# Altium PCB Unextended55.PcbDoc (part 1 of 2)
Units mm, origin at the board's own origin, x right, y up, seen from the top; angles counter-clockwise.
Board outline 275.2 x 94.2 mm, 2 copper layers (Component Side, Bottom Layer), stack 1.571 mm thick; 229 components, 125 nets, 706 pads, 180 vias.
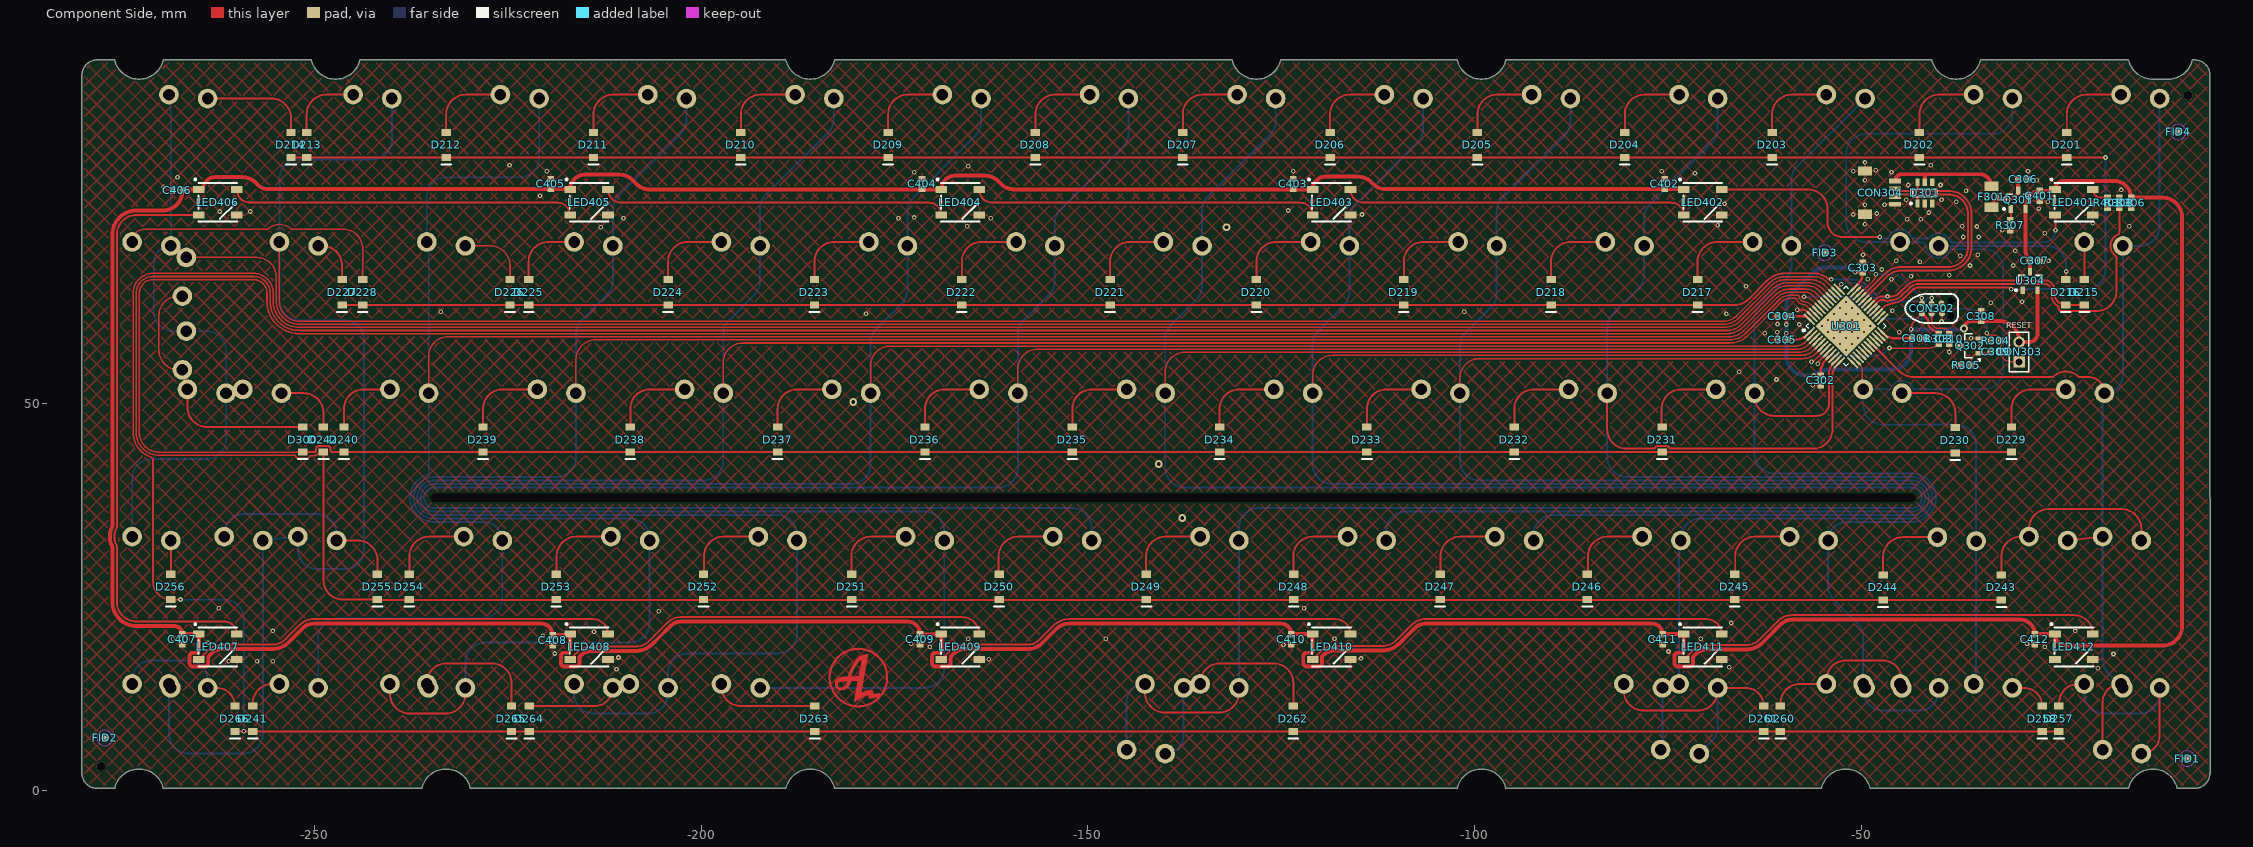
[diagram p0: Component Side view]
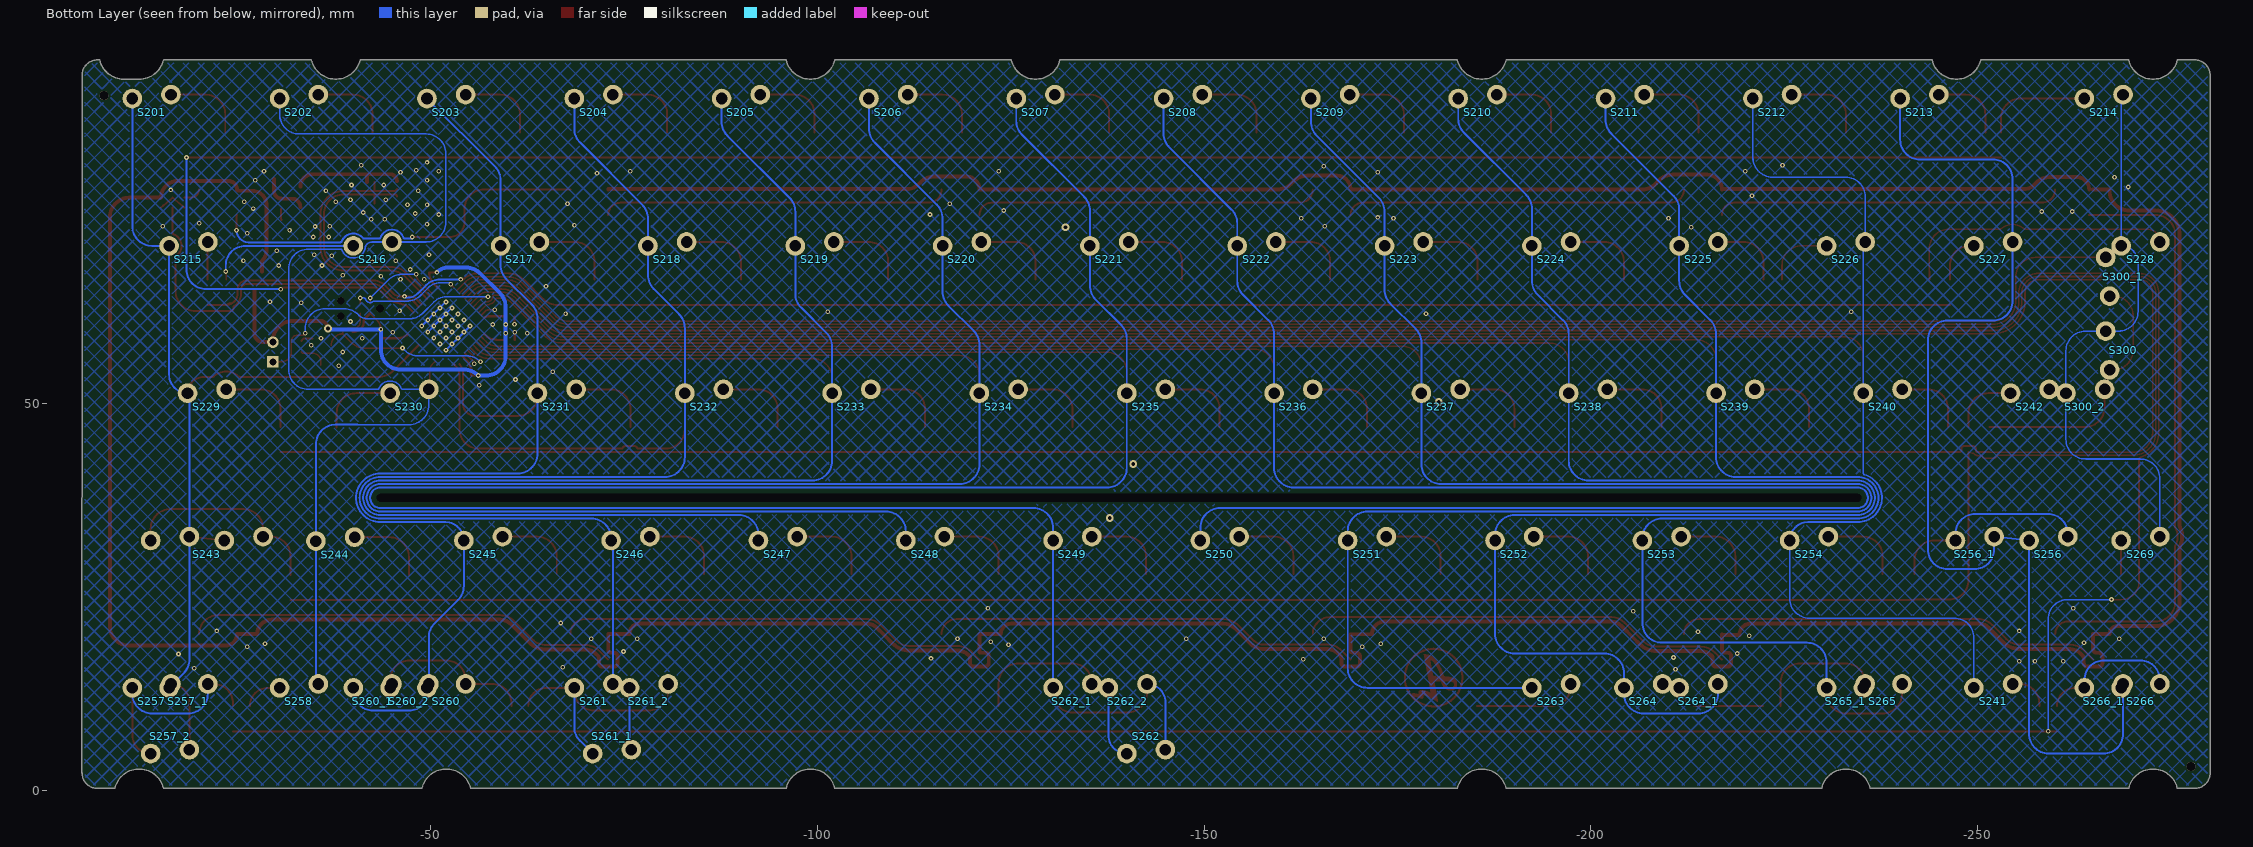
[diagram p1: Bottom Layer view, seen from below]

## Layer stack, top to bottom
Top Solder: solder mask 0.0102, Solder Resist, Dk 3.5
Component Side: signal copper 0.0356
Dielectric 1: core 1.5, FR-4, Dk 4.2
Bottom Layer: signal copper 0.0356
Solder Side: solder mask 0.0102, Solder Resist, Dk 3.5

## Board outline
-280.088,2.215 ccw(c-278.088,2.215) -278.088,0.215 -275.85,0.215 cw(c-272.7,-0.52) -269.55,0.215 -236.137,0.215 cw(c-232.987,-0.52) -229.838,0.215 -189.05,0.215 cw(c-185.9,-0.52) -182.75,0.215 -102.25,0.215 cw(c-99.1,-0.52) -95.95,0.215 -55.161,0.215 cw(c-52.011,-0.52) -48.861,0.215 -15.45,0.215 cw(c-12.3,-0.52) -9.15,0.215 -6.913,0.215 ccw(c-6.913,2.215) -4.913,2.215 ccw(c-4.913,2.238) -4.889,2.238 -4.889,36.576 -4.913,39.065 -4.913,92.415 ccw(c-6.913,92.415) -6.913,94.415 -7.177,94.415 cw(c-10.327,95.149) -10.283,91.915 -12.318,91.915 cw(c-12.3,95.15) -15.45,94.415 -34.575,94.415 cw(c-37.724,95.149) -40.874,94.415 -95.95,94.415 cw(c-99.1,95.149) -102.25,94.415 -125.061,94.415 cw(c-128.212,95.149) -131.361,94.415 -182.75,94.415 cw(c-185.9,95.149) -189.05,94.415 -244.125,94.415 cw(c-247.274,95.149) -250.424,94.415 -269.55,94.415 cw(c-272.7,95.149) -275.85,94.415 -278.088,94.415 ccw(c-278.088,92.415) -280.088,92.415 -280.088,39.065 -280.088,36.565

## Design rules (kind name [scope] priority, off if disabled: settings)
BoardOutlineClearance [All] p1: gap=0.254 ignorepadtopadclearanceinfootprint=FALSE except(0: Arc-SplitContinuation Track-SplitContinuation SMDPad-SplitContinuation THPad-SplitContinuation Via-SplitContinuation Fill-SplitContinuation Poly-SplitContinuation Region-SplitContinuation Text-SplitContinuation)
Clearance [All] p1: gap=0.2 ignorepadtopadclearanceinfootprint=FALSE except(0: Arc-Hole Track-Hole SMDPad-Hole THPad-Hole Via-Hole Fill-Hole Poly-Hole Region-Hole Text-Hole; 0.254: THPad-THPad THPad-Via THPad-Fill THPad-Poly THPad-Region THPad-Text Via-Via Via-Fill Via-Poly Via-Region Via-Text Fill-Fill Fill-Poly Fill-Region Fill-Text Poly-Poly Poly-Region Poly-Text Region-Region Region-Text Text-Text)
ComponentClearance [InComponent('No Component') And OnLayer('Component Side')] p1: gap=0.254 collisioncheckmode=3 verticalgap=0.254 showdistances=FALSE
DiffPairsRouting DiffPairsRouting_USB [InDifferentialPairClass('All Differential Pairs')] p1: maxlimit=0.254 minlimit=0.203 mostfreqgap=0.203 toplayer_minwidth=0.152 toplayer_maxwidth=0.381 toplayer_prefwidth=0.152 bottomlayer_minwidth=0.152 bottomlayer_maxwidth=0.381 bottomlayer_prefwidth=0.152 maxuncoupledlength=12.7
DiffPairsRouting [All] p2: maxlimit=0.254 minlimit=0.254 mostfreqgap=0.254 toplayer_minwidth=0.381 toplayer_maxwidth=0.381 toplayer_prefwidth=0.381 bottomlayer_minwidth=0.381 bottomlayer_maxwidth=0.381 bottomlayer_prefwidth=0.381 maxuncoupledlength=12.7
HoleSize [All] p1: absolutevalues=TRUE maxlimit=20 minlimit=0.025 maxpercent=80.000 minpercent=20.000
MatchedLengths MatchedLengths_USB_DiffPairs_1 [All] p1: tolerance=0.127 checknetsindiffpair=TRUE checkdiffpairvsdiffpair=FALSE checkxsignals=FALSE checkothers=FALSE
MatchedLengths MatchedLengths_USB_DiffPairs [All] p2: tolerance=0.127 checknetsindiffpair=TRUE checkdiffpairvsdiffpair=FALSE checkxsignals=FALSE checkothers=FALSE
PolygonConnect PolygonConnect_1 [All vs IsVia] p1: connectstyle=Direct reliefconductorwidth=0.254 reliefentries=4 polygonreliefangle="90 Angle" airgapwidth=0.254
PolygonConnect [All] p2: connectstyle=Relief reliefconductorwidth=0.254 reliefentries=4 polygonreliefangle="90 Angle" airgapwidth=0.254
RoutingVias [All] p1: holewidth=0.711 width=1.27 viastyle="Through Hole" minholewidth=0.711 minwidth=1.27 maxholewidth=0.711 maxwidth=1.27
SolderMaskExpansion [All] p1: expansion=0.102 istentingtop=FALSE
Width [All] p1: maxlimit=0.508 minlimit=0.203 preferedwidth=0.254 minimp=50.000000 maximp=50.000000 favimp=50.000000
27 further rules are at their usual default settings.

## Classes and differential pairs
component class 1_Unextended55_top: FID1 FID2 FID3 FID4
component class Designator: C201 C202 C203 C204 C205 C206 D201 D202 D203 D204 D205 D206 D207 D208 D209 D210 D211 D212 D213 D214 D215 D216 D217 D218 D219 D220 D221 D222 D223 D224 D225 D226 D227 D228 D229 D230 D231 D232 D233 D234 D235 D236 D237 D238 D239 D240 D241 D242 D243 D244 D245 D246 D247 D248 D249 D250 D251 D252 D253 D254 D255 D256 D257 D258 D260 D261 D262 D263 D264 D265 D266 D268 D300 S201 S202 S203 S204 S205 S206 S207 S208 S209 S210 S211 S212 S213 S214 S215 S216 S217 S218 S219 S220 S221 S222 S223 S224 S225 S226 S227 S228 S229 S230 S231 S232 S233 S234 S235 S236 S237 S238 S239 S240 S241 S242 S243 S244 S245 S246 S247 S248 S249 S250 S251 S252 S253 S254 S256 S256_1 S257 S257_1 S257_2 S258 S260 S260_1 S260_2 S261 S261_1 S261_2 S262 S262_1 S262_2 S263 S264 S264_1 S265 S265_1 S266 S266_1 S269 S300 S300_1 S300_2
differential pair D: +D_P -D_N

## Components (designator, comment, footprint, x,y, rotation, side; value= is the part's Value field where it differs from the comment)
C301 "" C0603[1608] -42.799,58.42 r180 top value=0.1uF
C302 "" C0603[1608] -55.245,52.959 r90 top value=0.1uF
C303 "" C0603[1608] -49.784,67.564 r270 top value=0.1uF
C304 "" C0603[1608] -60.198,61.249 r0 top value=0.1uF
C305 "" C0603[1608] -60.198,58.201 r0 top value=0.1uF
C306 "" C0603[1608] -29.083,78.994 r180 top value=4.7uF
C307 "" C0603[1608] -27.559,68.453 r180 top value=1uF
C308 "" C0603[1608] -34.487,61.291 r270 top value=1uF
C309 "" C0603[1608] -32.639,56.677 r180 top value=4.7uF
C310 "" C0603[1608] -38.608,58.328 r270 top value=470nF
C401 "" C0603[1608] -26.924,76.835 r90 top value=0.1uF
C402 "" C0603[1608] -75.438,78.374 r270 top value=0.1uF
C403 "" C0603[1608] -123.444,78.374 r270 top value=0.1uF
C404 "" C0603[1608] -171.45,78.374 r270 top value=0.1uF
C405 "" C0603[1608] -219.456,78.374 r270 top value=0.1uF
C406 "" C0603[1608] -267.736,77.56 r0 top value=0.1uF
C407 "" C0603[1608] -267.086,19.502 r90 top value=0.1uF
C408 "" C0603[1608] -219.207,19.375 r90 top value=0.1uF
C409 "" C0603[1608] -171.709,19.5 r90 top value=0.1uF
C410 "" C0603[1608] -123.703,19.502 r90 top value=0.1uF
C411 "" C0603[1608] -75.697,19.502 r90 top value=0.1uF
C412 "" C0603[1608] -27.564,19.502 r90 top value=0.1uF
CON302 "TC2030-IDC" TC2030-IDC-NL -40.894,62.265 r0 top
CON303 "Header 2" HDR1X2 -29.591,55.372 r90 top
CON304 "Header 5" "JST SM04B-SRSS-TB" -49.5,77.25 r270 top
D201 "Diode" SOD-123 -23.431,83.415 r90 top
D202 "Diode" SOD-123 -42.481,83.415 r90 top
D203 "Diode" SOD-123 -61.531,83.415 r90 top
D204 "Diode" SOD-123 -80.581,83.415 r90 top
D205 "Diode" SOD-123 -99.632,83.415 r90 top
D206 "Diode" SOD-123 -118.681,83.415 r90 top
D207 "Diode" SOD-123 -137.731,83.415 r90 top
D208 "Diode" SOD-123 -156.781,83.415 r90 top
D209 "Diode" SOD-123 -175.832,83.415 r90 top
D210 "Diode" SOD-123 -194.881,83.415 r90 top
D211 "Diode" SOD-123 -213.931,83.415 r90 top
D212 "Diode" SOD-123 -232.981,83.415 r90 top
D213 "Diode" SOD-123 -251.016,83.415 r90 top
D214 "Diode" SOD-123 -253.047,83.415 r90 top
D215 "Diode" SOD-123 -21.145,64.365 r90 top
D216 "Diode" SOD-123 -23.558,64.365 r90 top
D217 "Diode" SOD-123 -71.162,64.365 r90 top
D218 "Diode" SOD-123 -90.106,64.365 r90 top
D219 "Diode" SOD-123 -109.156,64.365 r90 top
D220 "Diode" SOD-123 -128.207,64.365 r90 top
D221 "Diode" SOD-123 -147.13,64.365 r90 top
D222 "Diode" SOD-123 -166.306,64.365 r90 top
D223 "Diode" SOD-123 -185.356,64.365 r90 top
D224 "Diode" SOD-123 -204.279,64.365 r90 top
D225 "Diode" SOD-123 -222.314,64.365 r90 top
D226 "Diode" SOD-123 -224.726,64.365 r90 top
D227 "Diode" SOD-123 -246.444,64.365 r90 top
D228 "Diode" SOD-123 -243.776,64.365 r90 top
D229 "Diode" SOD-123 -30.575,45.315 r90 top
D230 "Diode" SOD-123 -37.846,45.212 r90 top
D231 "Diode" SOD-123 -75.755,45.315 r90 top
D232 "Diode" SOD-123 -94.869,45.315 r90 top
D233 "Diode" SOD-123 -113.919,45.315 r90 top
D234 "Diode" SOD-123 -132.969,45.315 r90 top
D235 "Diode" SOD-123 -152.019,45.315 r90 top
D236 "Diode" SOD-123 -171.069,45.315 r90 top
D237 "Diode" SOD-123 -190.119,45.315 r90 top
D238 "Diode" SOD-123 -209.169,45.315 r90 top
D239 "Diode" SOD-123 -228.219,45.315 r90 top
D240 "Diode" SOD-123 -246.189,45.315 r90 top
D241 "Diode" SOD-123 -258,9.215 r90 top
D242 "Diode" SOD-123 -248.856,45.315 r90 top
D243 "Diode" SOD-123 -31.877,26.194 r90 top
D244 "Diode" SOD-123 -47.175,26.194 r90 top
D245 "Diode" SOD-123 -66.358,26.265 r90 top
D246 "Diode" SOD-123 -85.407,26.265 r90 top
D247 "Diode" SOD-123 -104.457,26.265 r90 top
D248 "Diode" SOD-123 -123.38,26.265 r90 top
D249 "Diode" SOD-123 -142.43,26.265 r90 top
D250 "Diode" SOD-123 -161.481,26.265 r90 top
D251 "Diode" SOD-123 -180.53,26.265 r90 top
D252 "Diode" SOD-123 -199.707,26.265 r90 top
D253 "Diode" SOD-123 -218.757,26.265 r90 top
D254 "Diode" SOD-123 -237.744,26.265 r90 top
D255 "Diode" SOD-123 -241.871,26.265 r90 top
D256 "Diode" SOD-123 -268.587,26.265 r90 top
D257 "Diode" SOD-123 -24.447,9.215 r90 top
D258 "Diode" SOD-123 -26.607,9.215 r90 top
D260 "Diode" SOD-123 -60.452,9.215 r90 top
D261 "Diode" SOD-123 -62.611,9.215 r90 top
D262 "Diode" SOD-123 -123.444,9.215 r90 top
D263 "Diode" SOD-123 -185.293,9.215 r90 top
D264 "Diode" SOD-123 -222.25,9.215 r90 top
D265 "Diode" SOD-123 -224.536,9.215 r90 top
D266 "Diode" SOD-123 -260.286,9.215 r90 top
D300 "Diode" SOD-123 -251.523,45.315 r90 top
D301 "SRV05" SOT-23-6 -41.783,77.216 r90 top
Designator31 "Comment" "ALPS-switch - 1.25U" -18.161,-121.539 r180 bottom
Designator32 "Comment" "ALPS-switch - 1.5U" -44.323,-121.031 r180 bottom
Designator33 "Comment" "ALPS-switch - 1.75" -74.89,-121.602 r180 bottom
Designator34 "Comment" Alps-switch -279.146,-119.253 r180 bottom
Designator34 "Comment" "ALPS-switch - 1.75" -214.289,-119.435 r180 bottom
Designator34_1 "Comment" Alps-switch -239.522,-151.384 r180 bottom
Designator34_1_1 "Comment" Alps-switch -235.458,-84.455 r180 bottom
Designator35 "Comment" Alps-switch -260.096,-119.253 r180 bottom
Designator35_1 "Comment" Alps-switch -35.562,-153.924 r180 bottom
Designator35_2 "Comment" Alps-switch -220.472,-151.384 r180 bottom
Designator35_2_1 "Comment" Alps-switch -216.408,-84.455 r180 bottom
Designator35_3 "Comment" Alps-switch -277.495,-151.384 r180 bottom
Designator35_3_1 "Comment" Alps-switch -273.431,-84.455 r180 bottom
Designator35_4 "Comment" Alps-switch -74.932,-83.312 r180 bottom
Designator35_5 "Comment" Alps-switch -55.755,-82.423 r180 bottom
Designator35_6 "Comment" Alps-switch -36.832,-82.169 r180 bottom
Designator35_7 "Comment" Alps-switch -16.893,-82.423 r180 bottom
Designator36 "Comment" Alps-switch -240.665,-119.253 r180 bottom
Designator36_1 "Comment" Alps-switch -16.55,-153.924 r180 bottom
Designator36_2 "Comment" Alps-switch -54.523,-154.178 r180 bottom
Designator36_3 "Comment" Alps-switch -201.041,-151.384 r180 bottom
Designator36_3_1 "Comment" Alps-switch -196.977,-84.455 r180 bottom
Designator36_4 "Comment" Alps-switch -258.064,-151.384 r180 bottom
Designator36_4_1 "Comment" Alps-switch -254,-84.455 r180 bottom
Designator37 "Comment" "ALPS-switch - 1.75" -80.732,-154.051 r180 bottom
Designator38 "Comment" "ALPS-switch - 1.5U" -264.822,-186.524 r180 bottom
Designator39 "Comment" "ALPS-switch - 1.5U" -235.866,-186.524 r180 bottom
Designator40 "Comment" "ALPS-switch - 1.5U" -22.379,-186.524 r180 bottom
Designator41 "Comment" "ALPS-switch - 1.5U" -49.938,-186.524 r180 bottom
F301 "Fuse Thermal" C1206[3216] -33.147,76.708 r90 top
FID1 "Plug" Fiducial_Nordic -7.874,4.064 r90 top
FID2 "Plug" Fiducial_Nordic -277.114,6.731 r90 top
FID3 "Plug" Fiducial_Nordic -54.737,69.469 r90 top
FID4 "Plug" Fiducial_Nordic -9.017,85.09 r90 top
LED401 "WS2812B" "WS2812B - 5050" -22.5,76 r0 top
LED402 "WS2812B" "WS2812B - 5050" -70.499,76 r0 top
LED403 "WS2812B" "WS2812B - 5050" -118.499,76 r0 top
LED404 "WS2812B" "WS2812B - 5050" -166.499,76 r0 top
LED405 "WS2812B" "WS2812B - 5050" -214.499,76 r0 top
LED406 "WS2812B" "WS2812B - 5050" -262.499,76 r0 top
LED407 "WS2812B" "WS2812B - 5050" -262.499,18.5 r0 top
LED408 "WS2812B" "WS2812B - 5050" -214.499,18.5 r0 top
LED409 "WS2812B" "WS2812B - 5050" -166.499,18.5 r0 top
LED410 "WS2812B" "WS2812B - 5050" -118.499,18.5 r0 top
LED411 "WS2812B" "WS2812B - 5050" -70.499,18.5 r0 top
LED412 "WS2812B" "WS2812B - 5050" -22.5,18.5 r0 top
Q301 "PMOS-2" SOT-23-3 -29.718,76.327 r90 top
Q302 "2N7002 NMOS" SOT-23-3 -35.941,57.439 r180 top
R303 "Res1" R0603[1608] -40.005,58.328 r270 top value=10K
R304 "Res1" R0603[1608] -32.639,58.074 r180 top value=10K
R305 "Res1" R0603[1608] -36.449,54.899 r180 top value=100K
R306 "Res1" R0603[1608] -15.113,75.946 r270 top value=10K
R307 "Res1" R0603[1608] -30.734,73.025 r270 top value=10K
R308 "Res1" R0603[1608] -16.637,75.946 r270 top value=470
R401 "Res1" R0603[1608] -18.161,75.946 r90 top value=470R
S201 "MX" "Alps-switch - switched pol" -13.912,85.415 r180 bottom locked
S202 "MX" "Alps-switch - switched pol" -32.962,85.415 r180 bottom locked
S203 "MX" "Alps-switch - switched pol" -52.012,85.415 r180 bottom locked
S204 "MX" "Alps-switch - switched pol" -71.062,85.415 r180 bottom locked
S205 "MX" "Alps-switch - switched pol" -90.112,85.415 r180 bottom locked
S206 "MX" "Alps-switch - switched pol" -109.162,85.415 r180 bottom locked
S207 "MX" "Alps-switch - switched pol" -128.212,85.415 r180 bottom locked
S208 "MX" "Alps-switch - switched pol" -147.262,85.415 r180 bottom locked
S209 "MX" "Alps-switch - switched pol" -166.312,85.415 r180 bottom locked
S210 "MX" "Alps-switch - switched pol" -185.362,85.415 r180 bottom locked
S211 "MX" "Alps-switch - switched pol" -204.412,85.415 r180 bottom locked
S212 "MX" "Alps-switch - switched pol" -223.462,85.415 r180 bottom locked
S213 "MX" "Alps-switch - switched pol" -242.512,85.415 r180 bottom locked
S214 "MX" "ALPS-switch - 1.5U" -266.325,85.415 r180 bottom locked
S215 "MX" "Alps-switch - switched pol" -18.675,66.365 r180 bottom locked
S216 "MX" Alps-switch -42.487,66.365 r180 bottom locked
S217 "MX" "Alps-switch - switched pol" -61.537,66.365 r180 bottom locked
S218 "MX" "Alps-switch - switched pol" -80.587,66.365 r180 bottom locked
S219 "MX" "Alps-switch - switched pol" -99.637,66.365 r180 bottom locked
S220 "MX" "Alps-switch - switched pol" -118.687,66.365 r180 bottom locked
S221 "MX" "Alps-switch - switched pol" -137.737,66.365 r180 bottom locked
S222 "MX" "Alps-switch - switched pol" -156.787,66.365 r180 bottom locked
S223 "MX" "Alps-switch - switched pol" -175.837,66.365 r180 bottom locked
S224 "MX" "Alps-switch - switched pol" -194.887,66.365 r180 bottom locked
S225 "MX" "Alps-switch - switched pol" -213.937,66.365 r180 bottom locked
S226 "MX" Alps-switch -232.987,66.365 r180 bottom locked
S227 "MX" Alps-switch -252.037,66.365 r180 bottom locked
S228 "MX" "Alps-switch - switched pol" -271.087,66.365 r180 bottom locked
S229 "MX" "Alps-switch - switched pol" -21.056,47.315 r180 bottom locked
S230 "MX" Alps-switch -47.25,47.315 r180 bottom locked
S231 "MX" "Alps-switch - switched pol" -66.3,47.315 r180 bottom locked
S232 "MX" "Alps-switch - switched pol" -85.35,47.315 r180 bottom locked
S233 "MX" "Alps-switch - switched pol" -104.4,47.315 r180 bottom locked
S234 "MX" "Alps-switch - switched pol" -123.45,47.315 r180 bottom locked
S235 "MX" "Alps-switch - switched pol" -142.5,47.315 r180 bottom locked
S236 "MX" "Alps-switch - switched pol" -161.55,47.315 r180 bottom locked
S237 "MX" "Alps-switch - switched pol" -180.6,47.315 r180 bottom locked
S238 "MX" "Alps-switch - switched pol" -199.65,47.315 r180 bottom locked
S239 "MX" "Alps-switch - switched pol" -218.7,47.315 r180 bottom locked
S240 "MX" "Alps-switch - switched pol" -237.75,47.315 r180 bottom locked
S241 "MX" Alps-switch -252.037,9.215 r180 bottom
S242 "MX" Alps-switch -256.775,47.315 r180 bottom locked
S243 "MX" "ALPS-switch - Left shift v2" -25.819,28.265 r180 bottom locked
S244 "MX" Alps-switch -37.655,28.194 r180 bottom locked
S245 "MX" "Alps-switch - switched pol" -56.775,28.265 r180 bottom locked
S246 "MX" "Alps-switch - switched pol" -75.825,28.265 r180 bottom locked
S247 "MX" "Alps-switch - switched pol" -94.875,28.265 r180 bottom locked
S248 "MX" "Alps-switch - switched pol" -113.925,28.265 r180 bottom locked
S249 "MX" "Alps-switch - switched pol" -132.975,28.265 r180 bottom locked
S250 "MX" "Alps-switch - switched pol" -152.025,28.265 r180 bottom locked
S251 "MX" "Alps-switch - switched pol" -171.075,28.265 r180 bottom locked
S252 "MX" "Alps-switch - switched pol" -190.124,28.265 r180 bottom locked
S253 "MX" "Alps-switch - switched pol" -209.175,28.265 r180 bottom locked
S254 "MX" "Alps-switch - switched pol" -228.225,28.265 r180 bottom locked
S256 "MX" "ALPS-switch - 2.25U" -259.18,28.265 r180 bottom locked
S256_1 "MX" "Alps-switch - switched pol" -249.655,28.265 r180 bottom locked
S257 "MX" "Alps-switch - switched pol" -13.912,9.215 r180 bottom
S257_1 "MX" Alps-switch -18.675,9.215 r180 bottom
S257_2 "MX" Alps-switch -16.294,9.215 r0 bottom
S258 "MX" Alps-switch -32.962,9.215 r180 bottom
S260 "MX" "Alps-switch - switched pol" -52.012,9.215 r180 bottom
S260_1 "MX" "Alps-switch - switched pol" -42.487,9.215 r180 bottom
S260_2 "MX" Alps-switch -47.25,9.215 r180 bottom
S261 "MX" Alps-switch -71.062,9.215 r180 bottom
S261_1 "MX" "Alps-switch - switched pol" -73.444,9.215 r0 bottom
S261_2 "MX" "Alps-switch - switched pol" -78.206,9.215 r180 bottom
S262 "MX" Alps-switch -142.5,9.215 r0 bottom
S262_1 "MX" Alps-switch -132.975,9.215 r180 bottom
S262_2 "MX" "Alps-switch - switched pol" -140.119,9.215 r180 bottom
S263 "MX" Alps-switch -194.887,9.215 r180 bottom
S264 "MX" "Alps-switch - switched pol" -206.794,9.215 r180 bottom
S264_1 "MX" Alps-switch -213.937,9.215 r180 bottom
S265 "MX" "Alps-switch - switched pol" -237.75,9.215 r180 bottom
S265_1 "MX" Alps-switch -232.987,9.215 r180 bottom
S266 "MX" "Alps-switch - switched pol" -271.087,9.215 r180 bottom
S266_1 "MX" Alps-switch -266.325,9.215 r180 bottom
S269 "MX" Alps-switch -271.087,28.265 r180 bottom locked
S300 "MX" Alps-switch -271.087,56.84 r90 bottom locked
S300_1 "MX" Alps-switch -271.087,66.365 r90 bottom locked
S300_2 "MX" "Alps-switch - switched pol" -263.944,47.315 r180 bottom locked
U301 "STM32F072/F303_LQFP48" "STM32 - COMBO 7X7MM" -51.97,60 r45 top locked
U304 "XC6206P332MR" SOT-23-3 -28.172,65.828 r90 top

## Footprints (in the part's own frame and the unit in brackets; to place one, negate y for a bottom-side part, rotate by r counter-clockwise, add the part's x,y. Pads: shape width x height; smd on the part's side, far side on the other; paste and mask are expansions set on the pad)
Alps-switch [mm]
  round 2.54 hole 1.5 mask+0.102: 1(-2.5,4) 2(2.5,4.5)
  round 1 on Mech14: ""(0,0)
"ALPS-switch - 1.5U" [mm]
  round 2.54 hole 1.5 mask+0.102: 1(-2.5,4) 2(2.5,4.5)
  round 1 on Mech14: ""(0,0)
"ALPS-switch - 1.25U" [mm]
  round 2.54 hole 1.5 mask+0.102: 1(-2.5,4) 2(2.5,4.5)
  round 1 on Mech14: ""(0,0)
"ALPS-switch - 1.75" [mm]
  round 2.54 hole 1.5 mask+0.102: 1(-2.5,4) 2(2.5,4.5)
  round 1 on Mech14: ""(0,0)
"ALPS-switch - 2.25U" [mm]
  round 2.54 hole 1.5 mask+0.102: 1(-2.5,4) 2(2.5,4.5)
  round 1 on Mech14: ""(0,0)
"ALPS-switch - Left shift v2" [mm]
  round 2.54 hole 1.5 mask+0.102: 1(-12.025,4) 1(2.5,4.5) 2(-7.025,4.5) 2(-2.5,4)
  round 1 on Mech14: ""(-9.525,0) ""(0,0)
"Alps-switch - switched pol" [mm]
  round 2.54 hole 1.5 mask+0.102: 1(2.5,4.5) 2(-2.5,4)
  round 1 on Mech14: ""(0,0)
C0603[1608] [mm] "Chip Resistor, 2-Leads, Body 1,57x0,80mm, IPC Medium Density"
  rect 0.8x0.85 smd: 1(-0.65,0) 2(0.65,0)
  body extent -0.83,-0.43 0.82,0.43, height 0.5
C1206[3216] [mm]
  rect 1.2x1.8 smd: 1(-1.35,0) 2(1.35,0)
  silkscreen extent -0.35,-0.8 0.35,0.8, body extent -1.6,-0.9 1.6,0.9, height 1.2
Fiducial_Nordic [mm]
  round 1 smd paste+0 mask+0.5: 0(0,0)
  Component Side keep-out circle w0.01: c0,0 r1
HDR1X2 [mm] "Connector; Header; 2 Position"
  rect 1.5x1.5 hole 0.9: 1(0,0)
  round 1.5 hole 0.9: 2(2.54,0)
  silkscreen extent -1.27,-1.27 3.81,1.27
"JST SM04B-SRSS-TB" [mm]
  rect 0.6x1.55 smd: 1(-1.5,3.875) 2(-0.5,3.875) 3(0.5,3.875) 4(1.5,3.875)
  rect 1.2x1.8 smd: 5(-2.8,0) 5(2.8,0)
  body extent -3.01,-0.76 2.99,4.19, height 3.25
R0603[1608] [mm] "Chip Resistor, 2-Leads, Body 1,57x0,80mm, IPC Medium Density"
  rect 0.8x0.85 smd: 1(-0.65,0) 2(0.65,0)
  body extent -0.83,-0.43 0.82,0.43, height 0.5
SOD-123 [mm]
  rect 0.91x1.22 smd: 1(1.635,0) 2(-1.635,0)
  silkscreen extent -2.54,-0.64 -2.54,0.63, body extent -1.87,-0.85 1.88,0.85, height 1.2
SOT-23-3 [mm] "3.3v regulator, used in Windsond S2 proto 1"
  rect 1x0.55 smd: 1(-1.2,0.95) 2(-1.2,-0.95) 3(1.2,0)
  silkscreen extent -1.32,-1.55 0.7,1.95, body extent -1.45,-1.5 1.1,1.5, height 1
SOT-23-6 [mm]
  rect 1x0.55 smd: 1(-1.375,0.95) 2(-1.375,0) 3(-1.375,-0.95) 4(1.375,-0.95) 5(1.375,0) 6(1.375,0.95)
  silkscreen extent -1.5,-1.55 0.46,1.92, body extent -1.37,-1.44 1.47,1.49, height 1.05
"STM32 - COMBO 7X7MM" [mm] "LQFP48, 7x7mm"
  oval 1.45x0.3 smd paste-5: 1(-4.225,2.75) 2(-4.225,2.25) 3(-4.225,1.75) 4(-4.225,1.25) 5(-4.225,0.75) 6(-4.225,0.25) 7(-4.225,-0.25) 8(-4.225,-0.75) 9(-4.225,-1.25) 10(-4.225,-1.75) 11(-4.225,-2.25) 12(-4.225,-2.75) 25(4.225,-2.75) 26(4.225,-2.25) 27(4.225,-1.75) 28(4.225,-1.25) 29(4.225,-0.75) 30(4.225,-0.25) 31(4.225,0.25) 32(4.225,0.75) 33(4.225,1.25) 34(4.225,1.75) 35(4.225,2.25) 36(4.225,2.75)
  oval 0.8x0.25 smd: 1(-3.4,2.75) 2(-3.4,2.25) 3(-3.4,1.75) 4(-3.4,1.25) 5(-3.4,0.75) 6(-3.4,0.25) 7(-3.4,-0.25) 8(-3.4,-0.75) 9(-3.4,-1.25) 10(-3.4,-1.75) 11(-3.4,-2.25) 12(-3.4,-2.75) 25(3.4,-2.75) 26(3.4,-2.25) 27(3.4,-1.75) 28(3.4,-1.25) 29(3.4,-0.75) 30(3.4,-0.25) 31(3.4,0.25) 32(3.4,0.75) 33(3.4,1.25) 34(3.4,1.75) 35(3.4,2.25) 36(3.4,2.75)
  oval 0.25x0.8 smd: 13(-2.75,-3.4) 14(-2.25,-3.4) 15(-1.75,-3.4) 16(-1.25,-3.4) 17(-0.75,-3.4) 18(-0.25,-3.4) 19(0.25,-3.4) 20(0.75,-3.4) 21(1.25,-3.4) 22(1.75,-3.4) 23(2.25,-3.4) 24(2.75,-3.4) 37(2.75,3.4) 38(2.25,3.4) 39(1.75,3.4) 40(1.25,3.4) 41(0.75,3.4) 42(0.25,3.4) 43(-0.25,3.4) 44(-0.75,3.4) 45(-1.25,3.4) 46(-1.75,3.4) 47(-2.25,3.4) 48(-2.75,3.4)
  oval 0.3x1.45 smd paste-5: 13(-2.75,-4.225) 14(-2.25,-4.225) 15(-1.75,-4.225) 16(-1.25,-4.225) 17(-0.75,-4.225) 18(-0.25,-4.225) 19(0.25,-4.225) 20(0.75,-4.225) 21(1.25,-4.225) 22(1.75,-4.225) 23(2.25,-4.225) 24(2.75,-4.225) 37(2.75,4.225) 38(2.25,4.225) 39(1.75,4.225) 40(1.25,4.225) 41(0.75,4.225) 42(0.25,4.225) 43(-0.25,4.225) 44(-0.75,4.225) 45(-1.25,4.225) 46(-1.75,4.225) 47(-2.25,4.225) 48(-2.75,4.225)
  rect 5.6x5.6 smd: 47(0,0)
  silkscreen extent -4.43,-3.65 3.65,3.65, body extent -3.52,-3.52 3.52,3.52, height 0.5
TC2030-IDC-NL [mm] "Tag-Connect 6-Pin with No Legs (PN# TC2030-IDC-NL)"
  round 0.9 hole 0.995 unplated: 0(-2.54,0) 0(2.54,-1.016) 0(2.54,1.016)
  round 0.79 smd paste-0.39: 1(-1.27,-0.635) 2(-1.27,0.635) 3(0,-0.635) 4(0,0.635) 5(1.35,-0.635) 6(1.27,0.635)
  silkscreen extent -3.43,-1.91 3.43,1.9
"WS2812B - 5050" [mm]
  rect 1.5x0.9 smd: 1(-2.45,1.65) 2(-2.45,-1.65) 3(2.45,-1.65) 4(2.45,1.65)
  silkscreen extent -3.05,-2.5 2.5,3.07, body extent -2.65,-2.45 2.7,2.5, height 1.5

## Part data
C301 C302 C303 C304 C305 C401 C402 C403 C404 C405 C406 C407 C408 C409 C410 C411 C412: library part Cap, "Capacitor", LCSC MFG=YAGEO, LCSC Part #=C14663, MRF.Part=CC0603KRX7R9BB104, Version="0603 imperial"
C306 C309: library part Cap, "Capacitor", LCSC MFG="Samsung Electro-Mechanics", LCSC Part #=C19666, MRF.Part=CL10A475KO8NNNC, Version="0603 imperial"
C307 C308: library part Cap, "Capacitor", LCSC MFG="Samsung Electro-Mechanics", LCSC Part #=C15849, MRF.Part=CL10A105KB8NNNC, Version="0603 imperial"
C310: library part Cap, "Capacitor", LCSC MFG="Samsung Electro-Mechanics", LCSC Part #=C1623, MRF.Part=CL10B474KA8NNNC, Version="0603 imperial"
CON302: library part "Header 3X2", "Header, 3-Pin, Dual row"
CON303: "Header, 2-Pin"
CON304: "JST for USB daughter board", LCSC MFG="JST Sales America", LCSC Part #=C160404, MRF.Part=SM04B-SRSS-TB(LF)(SN)
D201 D202 D203 D204 D205 D206 D207 D208 D209 D210 D211 D212 D213 D214 D215 D216 D217 D218 D219 D220 D221 D222 D223 D224 D225 D226 D227 D228 D229 D230 D231 D232 D233 D234 D235 D236 D237 D238 D239 D240 D241 D242 D243 D244 D245 D246 D247 D248 D249 D250 D251 D252 D253 D254 D255 D256 D257 D258 D260 D261 D262 D263 D264 D265 D266 D300: "Default Diode", LCSC MFG=ST(Semtech), LCSC Part #=C81598, MRF.Part=1N4148W, Version=SOD-123
D301: LCSC MFG="ProTek Devices", LCSC Part #=C85364, MRF.Part=SRV05-4-P-T7
F301: "Thermal Fuse", LCSC MFG="Shenzhen JDT Fuse", LCSC Part #=C135338, MRF.Part=ASMD1206-050
LED401 LED402 LED403 LED404 LED405 LED406 LED407 LED408 LED409 LED410 LED411 LED412: LCSC MFG=Worldsemi, LCSC Part #=C2874885, MRF.Part=WS2812B-V5/W
Q301: "P-Channel Power MOSFET", LCSC MFG="Vishay Intertech", LCSC Part #=C10487, MRF.Part=SI2301CDS-T1-GE3, Version=SOT23-3
Q302: library part MOSFET-N, "N-Channel MOSFET", LCSC MFG="Changjiang Electronics Tech (CJ)", LCSC Part #=C8545, MRF.Part=2N7002
R303 R304 R306 R307: "Resistor", LCSC MFG="Uniroyal Elec", LCSC Part #=C25804, MRF.Part=0603WAF1002T5E, Version="0603 imperial"
R305: "Resistor", LCSC MFG="Uniroyal Elec", LCSC Part #=C25803, MRF.Part=0603WAF1003T5E, Version="0603 imperial"
R308 R401: "Resistor", LCSC MFG="UNI-ROYAL(Uniroyal Elec)", LCSC Part #=C23179, MRF.Part=0603WAF4700T5E, Version="0603 imperial"
S201 S202 S203 S204 S205 S206 S207 S208 S209 S210 S211 S212 S213 S214 S216 S217 S218 S219 S220 S221 S222 S223 S224 S225 S226 S227 S228 S229 S230 S231 S232 S233 S234 S235 S236 S237 S238 S239 S240 S241 S242 S243 S244 S245 S246 S247 S248 S249 S250 S251 S252 S253 S254 S256 S256_1 S257 S257_1 S257_2 S258 S260 S260_1 S260_2 S261 S261_1 S261_2 S262 S262_1 S262_2 S263 S264 S264_1 S265 S265_1 S266 S266_1 S269 S300 S300_1 S300_2: library part SW-PB, "Switch"
S215: library part SW-PB, "TAB"
U301: LCSC MFG=Geehy, LCSC Part #=C915660, MRF.Part=APM32F072CBT6
U304: library part "SOT23 LDO", LCSC MFG="Torex Semicon", LCSC Part #=C5446, MRF.Part=XC6206P332MR

## Free pads (board coordinates)
  round 1.152 hole 1.152 unplated paste+0.148 mask+0.148: ""(-277.622,3.048) ""(-7.747,89.789)
  round 0 hole 1 slot 192 at 0 deg unplated: ""(-139,37.79)

## Via types
v1: diameter 0.6, hole 0.3, Component Side to Bottom Layer, tented both sides, 150 vias
v2: diameter 0.6, hole 0.3, Component Side to Bottom Layer, tented bottom, 25 vias
v3: diameter 1, hole 0.5, Component Side to Bottom Layer, tented both sides, 5 vias

## Nets (pads, with @x,y where several pads share a name; then routed paths per layer and width w, separated by ;. In a path a pad name is that pad's centre, name@x,y a point inside that pad or via, vN(x,y) a via of type N, cw(c..) or ccw(c..) an arc to the next point about the centre after c; other vN are vias at no path point)
BOOT0: C309.1 CON303.1 R304.1 U301.44 | length 36.3
  Component Side w0.203: v1(-57.404,63.777) cw(c-57.404,62.339) -57.245,63.769 cw(c-57.404,62.339) -56.387,63.356 U301.44@-55.488,62.457 ; v1(-33.782,59.055) ccw(c-33.528,59.055) -33.528,58.801 -32.716,58.801 cw(c-32.716,58.074) R304.1@-31.989,58.074 C309.1@-31.989,56.677 ccw(c-30.684,56.677) -30.684,55.372 CON303.1@-29.591,55.372
  Bottom Layer w0.203: v1(-57.404,63.777) -52.009,63.777 cw(c-52.009,61.529) -50.419,63.119 -48.895,61.595 ccw(c-47.362,63.128) -48.894,61.594 ccw(c-47.362,63.128) -47.362,60.96 -41.687,60.96 ccw(c-41.687,62.261) -40.767,61.341 -40.618,61.49 cw(c-38.831,59.703) -38.831,62.23 -36.322,62.23 cw(c-36.322,59.69) -33.782,59.69 v1(-33.782,59.055)
col1: S201.2 S215.2 S229.2 S243.2 S257.1 S257_1.1 S257_2.1 U301.20 | length 130.3
  Component Side w0.254: U301.20@-48.452,57.543 -45.064,54.155 ccw(c-43.268,55.951) -43.268,53.411 -25.312,53.411 ccw(c-25.313,53.665) -25.139,53.48 cw(c-23.556,51.815) -21.973,53.48 ; S243.2@-23.319,32.265 S243.2@-18.794,32.765 ; -22.366,53.78 cw(c-23.556,51.815) -21.974,53.48 ; S257_2.1@-18.794,5.215 -18.794,11.334 cw(c-16.412,11.334) S257.1@-16.412,13.715 ; S229.2@-18.556,51.315 ccw(c-20.652,51.315) -20.652,53.411 -21.801,53.411 cw(c-21.8,53.665) -21.973,53.48
  Bottom Layer w0.254: S257_1.1@-16.175,13.215 -18.05,15.09 cw(c-16.254,16.886) -18.794,16.886 S243.2@-18.794,32.765 -18.794,51.078 cw(c-18.556,51.078) S229.2@-18.556,51.315 ccw(c-18.556,53.696) -16.175,53.696 S215.2@-16.175,70.365 -13.952,70.365 ccw(c-13.952,72.905) -11.412,72.905 S201.2@-11.412,89.415
col2: S202.2 S216.2 S230.2 S244.1 S258.2 U301.14 | length 148.8
  Component Side w0.203: U301.14@-50.573,55.421 -50.177,55.025 cw(c-50.846,54.356) -49.9,54.356 -49.9,52.177 ccw(c-49.388,52.177) S230.2@-49.75,51.815
  Bottom Layer w0.203: -40.513,47.244 -47.21,47.244 cw(c-47.21,49.784) -49.75,49.784 S230.2@-49.75,51.815 -46.379,51.815 ccw(c-46.38,52.018) -46.193,51.937 cw(c-44.75,51.315) -43.307,51.937 ccw(c-43.12,52.018) -43.121,51.815 -34.163,51.815 ccw(c-34.163,54.355) -31.623,54.355 -31.623,67.396 ccw(c-34.163,67.396) -34.163,69.936 -38.33,69.936 ccw(c-38.329,69.733) -38.518,69.807 cw(c-39.987,70.365) -39.561,68.852 ; -38.892,69.238 cw(c-39.987,70.365) -41.503,69.949 cw(c-39.987,70.365) -41.553,70.232 ccw(c-41.756,70.214) -41.565,70.283 ccw(c-42.395,69.981) -42.395,70.865 S216.2@-44.987,70.865 -49.403,70.865 cw(c-49.403,73.405) -51.943,73.405 -51.943,82.296 cw(c-49.403,82.296) -49.403,84.836 -33.002,84.836 ccw(c-33.002,87.376) -31.623,85.243 ccw(c-33.002,87.376) -30.462,87.376 S202.2@-30.462,89.415
  Bottom Layer w0.254: -40.513,47.244 -37.695,47.244 cw(c-37.695,44.704) -35.155,44.704 S244.1@-35.155,32.194 -35.155,14.456 cw(c-36.204,14.456) S258.2@-35.462,13.715
col3: S203.2 S217.2 S231.2 S245.2 S260.2 S260_1.2 S260_2.2 U301.11 | length 147.1
  Component Side w0.254: S231.2@-63.8,51.315 -63.8,50.927 ccw(c-61.26,50.927) -61.26,48.387 -55.753,48.387 ccw(c-55.753,49.965) -54.175,49.965 -54.175,53.909 cw(c-52.555,53.909) -53.822,54.919 ccw(c-54.021,55.077) U301.11@-53.813,54.931 ; U301.11@-53.813,54.931 cw(c-53.42,54.661) -53.757,54.998 -53.731,55.025 ccw(c-53.912,55.203) -53.704,55.057 -53.718,55.07 U301.11@-53.7,55.055
  Bottom Layer w0.254: S203.2@-49.512,89.415 -58.294,80.634 ccw(c-56.497,78.838) -59.037,78.838 S217.2@-59.037,70.365 -59.037,67.872 cw(c-61.577,67.872) -59.781,66.076 -63.056,62.801 ccw(c-61.26,61.005) -63.8,61.005 S231.2@-63.8,51.315 -63.8,43.478 ccw(c-61.26,43.478) -61.26,40.938 -43.5,40.938 cw(c-43.5,37.79) -43.5,34.642 -51.898,34.642 ccw(c-51.898,32.265) S245.2@-54.275,32.265 -54.275,26.371 ccw(c-51.735,26.371) -53.531,24.575 -50.494,21.538 cw(c-52.29,19.742) -49.75,19.742 S260_2.2@-49.75,13.715 -49.75,12.827 ccw(c-47.21,12.827) -47.21,10.287 -42.527,10.287 ccw(c-42.527,12.827) -39.987,12.827 S260_1.2@-39.987,13.215
col4: S204.2 S218.2 S232.2 S246.2 S261.2 S261_1.2 S261_2.2 U301.12 | length 204.9
  Component Side w0.254: S232.2@-82.85,51.315 -82.85,46.649 ccw(c-80.31,46.649) -80.686,44.137 ccw(c-80.65,44.388) -80.651,44.134 -76.887,44.134 ccw(c-76.889,44.388) -76.66,44.277 ; -76.66,44.277 cw(c-76.366,44.135) -76.366,44.462 -75.145,44.462 cw(c-75.145,44.135) -74.851,44.277 ; -74.851,44.276 ccw(c-74.622,44.388) -74.624,44.134 -56.261,44.134 ccw(c-56.261,46.674) -53.721,46.674 -53.721,53.653 cw(c-52.104,53.653) -53.248,54.796 cw(c-51.304,53.359) U301.12@-53.013,55.068
  Bottom Layer w0.254: S261_1.2@-75.944,5.215 ccw(c-76.517,5.788) -75.706,5.788 S261_2.2@-75.706,13.215 ; S261.2@-73.562,13.715 -73.562,31.691 cw(c-72.751,31.691) S246.2@-73.325,32.265 -73.325,32.556 cw(c-70.785,32.556) -70.785,35.096 -43.5,35.096 ccw(c-43.5,37.79) -43.5,40.484 -80.31,40.484 cw(c-80.31,43.024) -82.85,43.024 S232.2@-82.85,51.315 -82.85,59.735 cw(c-80.31,59.735) -82.106,61.531 -78.831,64.806 ccw(c-80.627,66.602) -78.087,66.602 S218.2@-78.087,70.365 -78.087,73.895 cw(c-75.547,73.895) -77.344,75.691 -69.306,83.729 ccw(c-71.102,85.525) -68.562,85.525 S204.2@-68.562,89.415
col5: S205.2 S219.2 S233.2 S247.2 U301.6 | length 221
  Component Side w0.203: S233.2@-101.9,51.315 -101.9,51.363 cw(c-101.697,51.362) -101.839,51.507 ccw(c-102.137,51.815) -101.839,52.123 cw(c-101.697,52.268) -101.9,52.267 -101.9,53.251 cw(c-99.36,53.251) -99.36,55.791 -57.521,55.791 ccw(c-57.521,58.178) -55.834,56.49 ; -55.833,56.49 U301.6@-55.134,57.189
  Bottom Layer w0.254: S247.2@-92.375,32.265 -92.375,33.01 cw(c-89.835,33.01) -89.835,35.55 -43.5,35.55 ccw(c-43.5,37.79) -43.5,40.03 -99.36,40.03 cw(c-99.36,42.57) -101.9,42.57 S233.2@-101.9,51.315 -101.9,57.322 cw(c-99.36,57.322) -101.156,59.118 -97.881,62.393 ccw(c-99.677,64.189) -97.137,64.189 S219.2@-97.137,70.365 -97.137,74.784 cw(c-94.597,74.784) -96.394,76.58 -88.356,84.618 ccw(c-90.152,86.414) -87.612,86.414 S205.2@-87.612,89.415
col6: S206.2 S220.2 S234.2 S248.2 U301.5 | length 277.6
  Component Side w0.203: S234.2@-120.95,51.315 -120.95,53.654 cw(c-118.41,53.654) -118.41,56.194 -57.79,56.194 ccw(c-57.79,58.496) -56.163,56.868 ccw(c-57.79,58.496) -56.162,56.869 U301.5@-55.488,57.543
  Bottom Layer w0.254: S248.2@-111.425,32.265 -111.425,33.464 cw(c-108.885,33.464) -108.885,36.004 -43.5,36.004 ccw(c-43.5,37.79) -43.5,39.576 -118.41,39.576 cw(c-118.41,42.116) -120.95,42.116 S234.2@-120.95,51.315 -120.95,57.576 cw(c-118.41,57.576) -120.206,59.372 -116.931,62.647 ccw(c-118.727,64.443) -116.187,64.443 S220.2@-116.187,70.365 -116.187,73.895 cw(c-113.647,73.895) -115.444,75.691 -107.406,83.729 ccw(c-109.202,85.525) -106.662,85.525 S206.2@-106.662,89.415
col7: S207.2 S221.2 S235.2 S249.2 S262.1 S262_1.1 S262_2.1 U301.4 | length 380
  Component Side w0.203: S235.2@-140,51.315 -140,54.058 cw(c-137.46,54.058) -137.46,56.598 -58.059,56.598 ccw(c-58.059,58.815) -56.492,57.246 ; -56.491,57.247 U301.4@-55.841,57.896
  Component Side w0.254: S262_2.1@-142.619,13.715 -142.619,12.573 ccw(c-140.079,12.573) -140.079,10.033 -133.015,10.033 ccw(c-133.015,12.573) -130.475,12.573 S262_1.1@-130.475,13.215
  Bottom Layer w0.254: S262.1@-145,5.215 -145,11.334 cw(c-142.619,11.334) S262_2.1@-142.619,13.715 ; S262_1.1@-130.475,13.215 S249.2@-130.475,32.265 -130.475,33.918 cw(c-127.935,33.918) -127.935,36.458 -43.5,36.458 ccw(c-43.5,37.79) -43.5,39.122 -137.46,39.122 cw(c-137.46,41.662) -140,41.662 S235.2@-140,51.315 -140,58.338 cw(c-137.46,58.338) -139.256,60.134 -135.981,63.409 ccw(c-137.777,65.205) -135.237,65.205 S221.2@-135.237,70.365 -135.237,74.911 cw(c-132.697,74.911) -134.494,76.707 -126.456,84.745 ccw(c-128.252,86.541) -125.712,86.541 S207.2@-125.712,89.415
col8: S208.2 S222.2 S236.2 S250.2 U301.3 | length 330.3
  Component Side w0.203: S236.2@-159.05,51.315 -159.05,54.461 cw(c-156.51,54.461) -156.51,57.001 -58.327,57.001 ccw(c-58.327,59.133) -56.82,57.625 U301.3@-56.195,58.25
  Bottom Layer w0.254: S250.2@-149.525,32.265 -149.525,33.918 ccw(c-152.065,33.918) -152.065,36.458 -234.5,36.458 cw(c-234.5,37.79) -234.5,39.122 -161.59,39.122 ccw(c-161.59,41.662) -159.05,41.662 S236.2@-159.05,51.315 -159.05,58.973 cw(c-156.51,58.973) -158.306,60.769 -155.031,64.044 ccw(c-156.827,65.84) -154.287,65.84 S222.2@-154.287,70.365 -154.287,73.26 cw(c-151.747,73.26) -153.544,75.056 -145.506,83.094 ccw(c-147.302,84.89) -144.762,84.89 S208.2@-144.762,89.415
col9: S209.2 S223.2 S237.2 S251.2 S263.1 U301.2 | length 353.5
  Component Side w0.203: S237.2@-178.1,51.315 -178.1,54.864 cw(c-175.56,54.864) -175.56,57.404 -58.596,57.404 ccw(c-58.596,59.452) -57.149,58.003 U301.2@-56.549,58.603
  Bottom Layer w0.254: S263.1@-192.387,13.215 -171.115,13.215 ccw(c-171.115,15.755) -168.575,15.755 S251.2@-168.575,32.265 -168.575,33.464 ccw(c-171.115,33.464) -171.115,36.004 -234.5,36.004 cw(c-234.5,37.79) -234.5,39.576 -180.64,39.576 ccw(c-180.64,42.116) -178.1,42.116 S237.2@-178.1,51.315 -178.1,57.83 cw(c-175.56,57.83) -177.356,59.626 -174.081,62.901 ccw(c-175.877,64.697) -173.337,64.697 S223.2@-173.337,70.365 -173.337,74.784 cw(c-170.797,74.784) -172.594,76.58 -164.556,84.618 ccw(c-166.352,86.414) -163.812,86.414 S209.2@-163.812,89.415
col10: S210.2 S224.2 S238.2 S252.2 S264.2 S264_1.2 U301.46 | length 347.1
  Component Side w0.203: S238.2@-197.15,51.315 -197.15,55.267 cw(c-194.61,55.267) -194.61,57.807 -67.023,57.807 ccw(c-67.023,61.154) -64.657,58.787 ; -64.657,58.787 -60.594,62.85 ; -60.594,62.85 -60.382,63.062 ; -60.382,63.062 cw(c-59.153,61.839) -59.153,63.573 -58.54,63.573 cw(c-58.541,63.369) -58.35,63.439 ccw(c-57.404,63.777) -58.083,63.036 ccw(c-57.404,63.777) -57.631,62.799 cw(c-57.677,62.601) -57.601,62.789 ccw(c-57.447,63.162) -57.505,62.763 ccw(c-57.447,63.162) -57.501,62.762 cw(c-57.649,61.731) -57.353,62.73 cw(c-57.649,61.731) -56.912,62.468 U301.46@-56.195,61.75
  Bottom Layer w0.254: S264_1.2@-216.437,13.715 -216.437,12.446 ccw(c-213.897,12.446) -213.897,9.906 -206.834,9.906 ccw(c-206.834,12.446) -204.294,12.446 S264.2@-204.294,13.215 -204.294,15.113 cw(c-201.754,15.113) -201.754,17.653 -190.164,17.653 ccw(c-190.164,20.193) -187.624,20.193 S252.2@-187.624,32.265 -187.624,33.01 ccw(c-190.164,33.01) -190.164,35.55 -234.5,35.55 cw(c-234.5,37.79) -234.5,40.03 -199.69,40.03 ccw(c-199.69,42.57) -197.15,42.57 S238.2@-197.15,51.315 -197.15,58.973 cw(c-194.61,58.973) -196.406,60.769 -193.131,64.044 ccw(c-194.927,65.84) -192.387,65.84 S224.2@-192.387,70.365 -192.387,75.165 cw(c-189.847,75.165) -191.644,76.961 -183.606,84.999 ccw(c-185.402,86.795) -182.862,86.795 S210.2@-182.862,89.415
col11: S211.2 S225.2 S239.2 S253.2 S265.1 S265_1.1 U301.45 | length 334.2
  Component Side w0.203: S239.2@-216.2,51.315 -216.2,55.67 cw(c-213.66,55.67) -213.66,58.21 -67.023,58.21 ccw(c-67.023,61.154) -64.943,59.071 -60.879,63.135 -60.665,63.349 cw(c-59.153,61.839) -59.153,63.976 -58.193,63.976 cw(c-58.209,63.773) -58.006,63.775 ccw(c-57.404,63.777) -58.003,63.722 ccw(c-57.404,63.777) -57.511,63.185 cw(c-57.549,62.986) -57.448,63.162 cw(c-57.672,61.346) -56.377,62.64 U301.45@-55.841,62.104
  Component Side w0.254: S265.1@-240.25,13.715 -240.25,12.446 ccw(c-237.71,12.446) -237.71,9.906 -233.027,9.906 ccw(c-233.027,12.446) S265_1.1@-230.487,12.446
  Bottom Layer w0.254: S265_1.1@-230.487,12.446 S265_1.1@-230.487,13.215 -230.487,16.51 cw(c-227.947,16.51) -227.947,19.05 -209.215,19.05 ccw(c-209.215,21.59) -206.675,21.59 S253.2@-206.675,32.265 -206.675,32.556 ccw(c-209.215,32.556) -209.215,35.096 -234.5,35.096 cw(c-234.5,37.79) -234.5,40.484 -218.74,40.484 ccw(c-218.74,43.024) -216.2,43.024 S239.2@-216.2,51.315 -216.2,58.973 cw(c-213.66,58.973) -215.456,60.769 -212.181,64.044 ccw(c-213.977,65.84) -211.437,65.84 S225.2@-211.437,70.365 -211.437,75.038 cw(c-208.897,75.038) -210.694,76.834 -202.656,84.872 ccw(c-204.452,86.668) -201.912,86.668 S211.2@-201.912,89.415
col12: S212.2 S226.2 S240.2 S241.1 S254.2 U301.43 | length 310.1
  Component Side w0.203: S240.2@-235.25,51.315 -235.25,56.074 cw(c-232.71,56.074) -232.71,58.614 -67.023,58.614 ccw(c-67.023,61.154) -65.227,59.358 -60.949,63.635 cw(c-59.153,61.839) -59.153,64.379 -57.277,64.379 cw(c-57.277,62.992) -56.297,63.973 ; -56.296,63.973 U301.43@-55.134,62.811
  Bottom Layer w0.203: S241.1@-249.537,13.215 -249.537,19.685 cw(c-246.997,19.685) -246.997,22.225 -228.265,22.225 ccw(c-228.265,24.765) -225.725,24.765 S254.2@-225.725,32.265 ; -237.016,39.681 -237.016,39.639 cw(c-234.5,37.79) -235.394,40.782 ccw(c-235.453,40.976) -235.31,40.832 ccw(c-235.453,40.976) -235.25,40.975 S240.2@-235.25,51.315 -235.25,70.628 ccw(c-235.487,70.628) S226.2@-235.487,70.865 -235.487,76.708 cw(c-232.947,76.708) -232.947,79.248 -223.502,79.248 ccw(c-223.502,81.788) -220.962,81.788 S212.2@-220.962,89.415
  Bottom Layer w0.254: -237.016,39.681 ccw(c-234.5,37.79) -234.5,34.642 -228.102,34.642 cw(c-228.102,32.265) S254.2@-225.725,32.265
col13: S213.2 S227.2 S256.1 S256_1.1 S266.2 S266_1.2 U301.38 | length 356.7
  Component Side w0.203: S227.2@-254.537,70.865 -254.537,63.17 ccw(c-251.997,63.17) -251.997,60.63 -67.691,60.63 ccw(c-67.691,62.766) -67.318,60.662 ccw(c-67.355,60.862) -67.306,60.665 -67.305,60.665 ccw(c-67.976,63.287) -66.062,61.374 -61.902,65.534 cw(c-59.821,63.452) -59.821,66.395 -56.198,66.395 cw(c-56.198,63.944) -54.465,65.677 U301.38@-53.367,64.579
  Bottom Layer w0.254: S266_1.2@-268.825,13.715 -268.825,7.255 ccw(c-266.285,7.255) -266.285,4.715 -259.22,4.715 ccw(c-259.22,7.255) -256.68,7.255 S256.1@-256.68,32.265 S256_1.1@-252.155,32.765 -252.155,31.115 ccw(c-249.615,31.115) -249.615,28.575 -246.126,28.575 ccw(c-246.126,31.115) -243.586,31.115 -243.586,58.166 ccw(c-246.126,58.166) -246.126,60.706 -251.997,60.706 cw(c-251.997,63.246) -254.537,63.246 S227.2@-254.537,70.865 -254.537,78.994 cw(c-251.997,78.994) -251.997,81.534 -242.552,81.534 ccw(c-242.552,84.074) -240.012,84.074 S213.2@-240.012,89.415
col14: S214.2 S228.2 S242.2 S269.2 S300.2 S300_1.2 S300_2.2 U301.39 | length 297.5
  Component Side w0.203: S300_1.2@-266.587,68.865 -257.481,68.865 cw(c-257.481,66.325) -254.941,66.325 -254.941,63.17 ccw(c-251.997,63.17) -254.935,62.983 -254.935,62.981 ccw(c-251.997,63.17) -251.997,60.226 -67.691,60.226 ccw(c-67.691,62.766) -65.895,60.97 -61.617,65.248 cw(c-59.821,63.452) -59.821,65.992 -56.539,65.992 cw(c-56.539,63.452) -54.743,65.248 U301.39@-53.72,64.225
  Bottom Layer w0.203: S269.2@-273.587,32.765 -273.587,40.259 cw(c-271.047,40.259) -271.047,42.799 -263.984,42.799 ccw(c-263.984,45.339) -261.444,45.339 S300_2.2@-261.444,51.315 -261.444,56.8 ccw(c-263.984,56.8) -263.984,59.34 S300.2@-266.587,59.34 -268.224,59.34 cw(c-268.224,61.88) -270.764,61.88 -270.764,68.188 cw(c-268.587,68.188) S228.2@-268.587,70.365 -268.587,89.342 ccw(c-269.398,89.342) S214.2@-268.825,89.915
D_N: CON304.2 D301.6 U301.32 | length 34.1
  Component Side w0.254: U301.32@-49.513,63.518 -49.513,63.53 -49.083,63.96 cw(c-49.04,63.96) -49.071,63.99 -46.622,66.439 cw(c-44.826,64.643) -44.826,67.183 -38.735,67.183 ccw(c-38.735,70.18) -35.738,70.18 -35.738,74.481 ccw(c-38.735,74.481) -38.735,77.479 -42.799,77.479 ; CON304.2@-45.625,77.75 ccw(c-45.354,77.75) -45.354,77.479 -42.799,77.479 ; D301.6@-42.733,78.591 -42.733,77.648 cw(c-42.987,77.649) -42.799,77.479
D_P: CON304.3 D301.1 U301.33 | length 33.1
  Component Side w0.254: U301.33@-49.866,63.871 -49.854,63.871 -49.424,64.301 ccw(c-49.424,64.344) -49.394,64.314 -46.944,66.763 cw(c-44.827,64.646) -46.943,66.765 cw(c-44.827,64.646) -44.827,67.64 -38.735,67.64 ccw(c-38.735,70.18) -36.195,70.18 -36.195,74.481 ccw(c-38.735,74.481) -38.735,77.021 -42.799,77.021 ; CON304.3@-45.625,76.75 cw(c-45.354,76.75) -45.354,77.021 -42.799,77.021 ; D301.1@-42.733,75.841 -42.733,76.955 ccw(c-42.799,76.955) -42.799,77.021